# EAGLE board SparkFun_Magnetometer_MMC5983MA_Qwiic_Micro-Panel (EAGLE 9.6.2), part 1 of 7
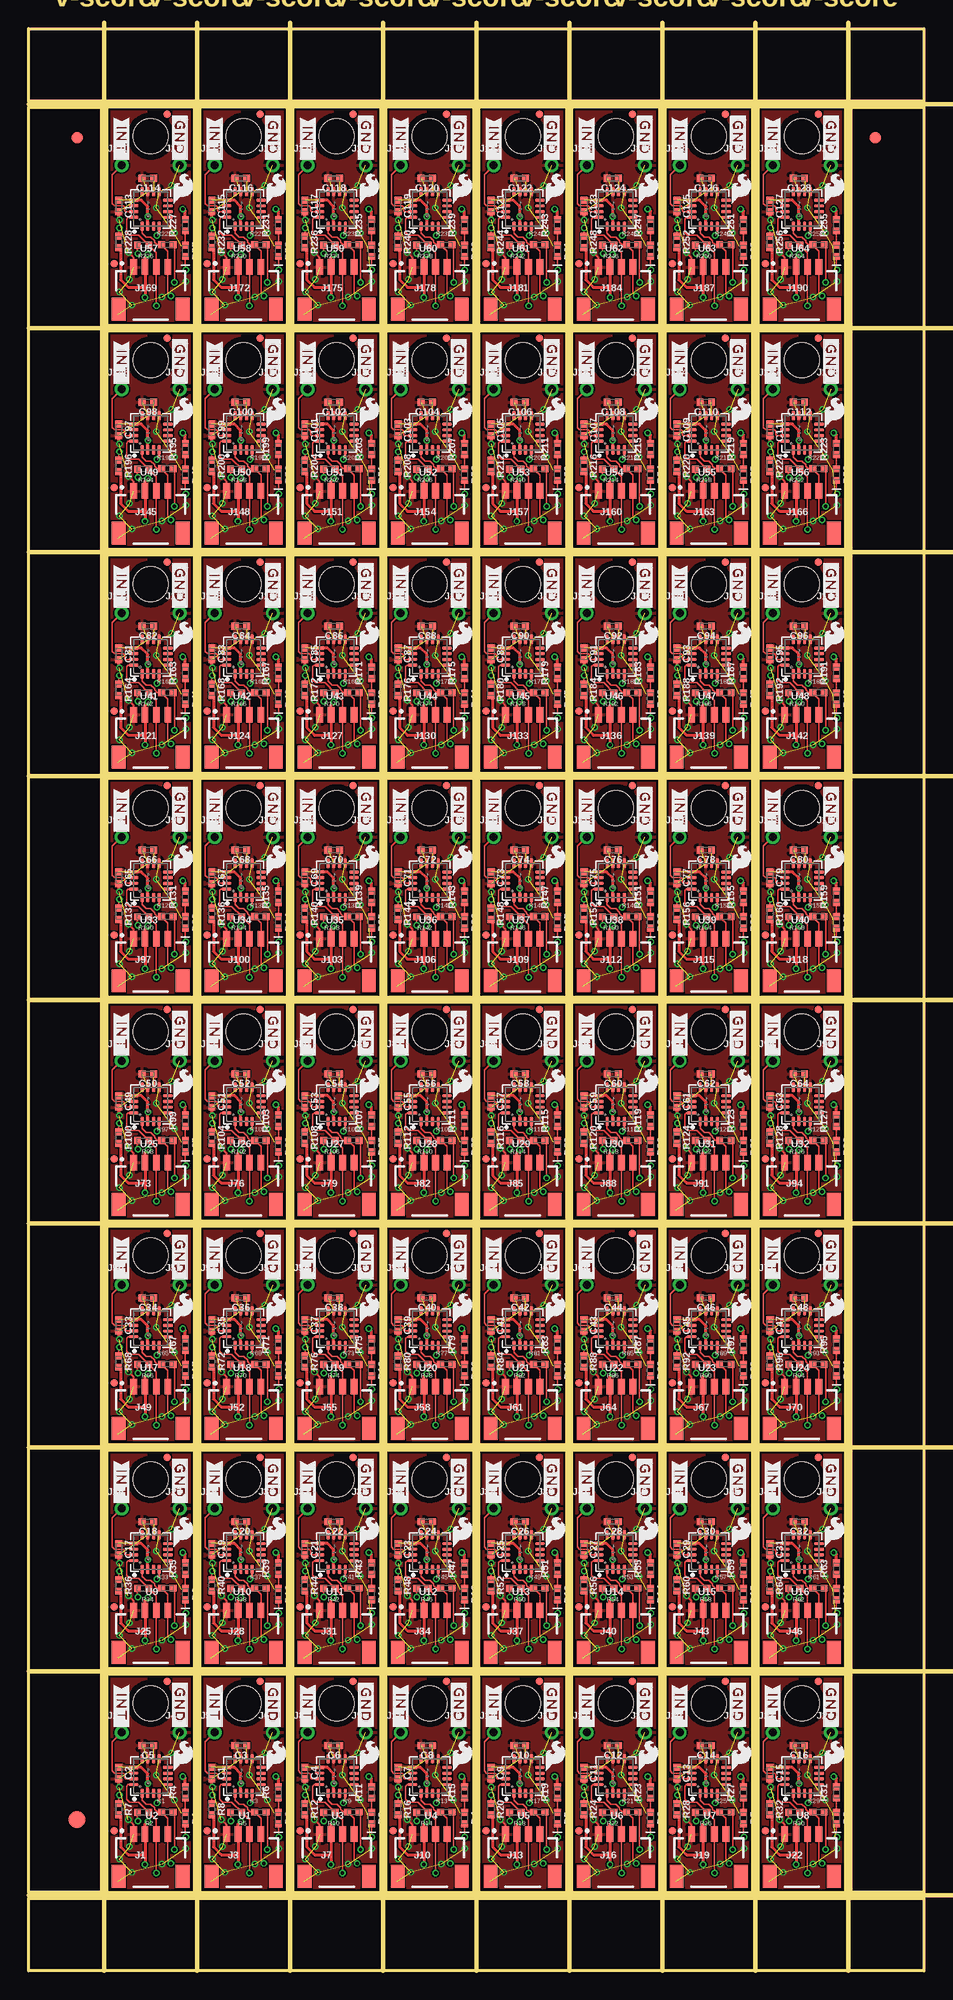
[diagram p0: board, top side]
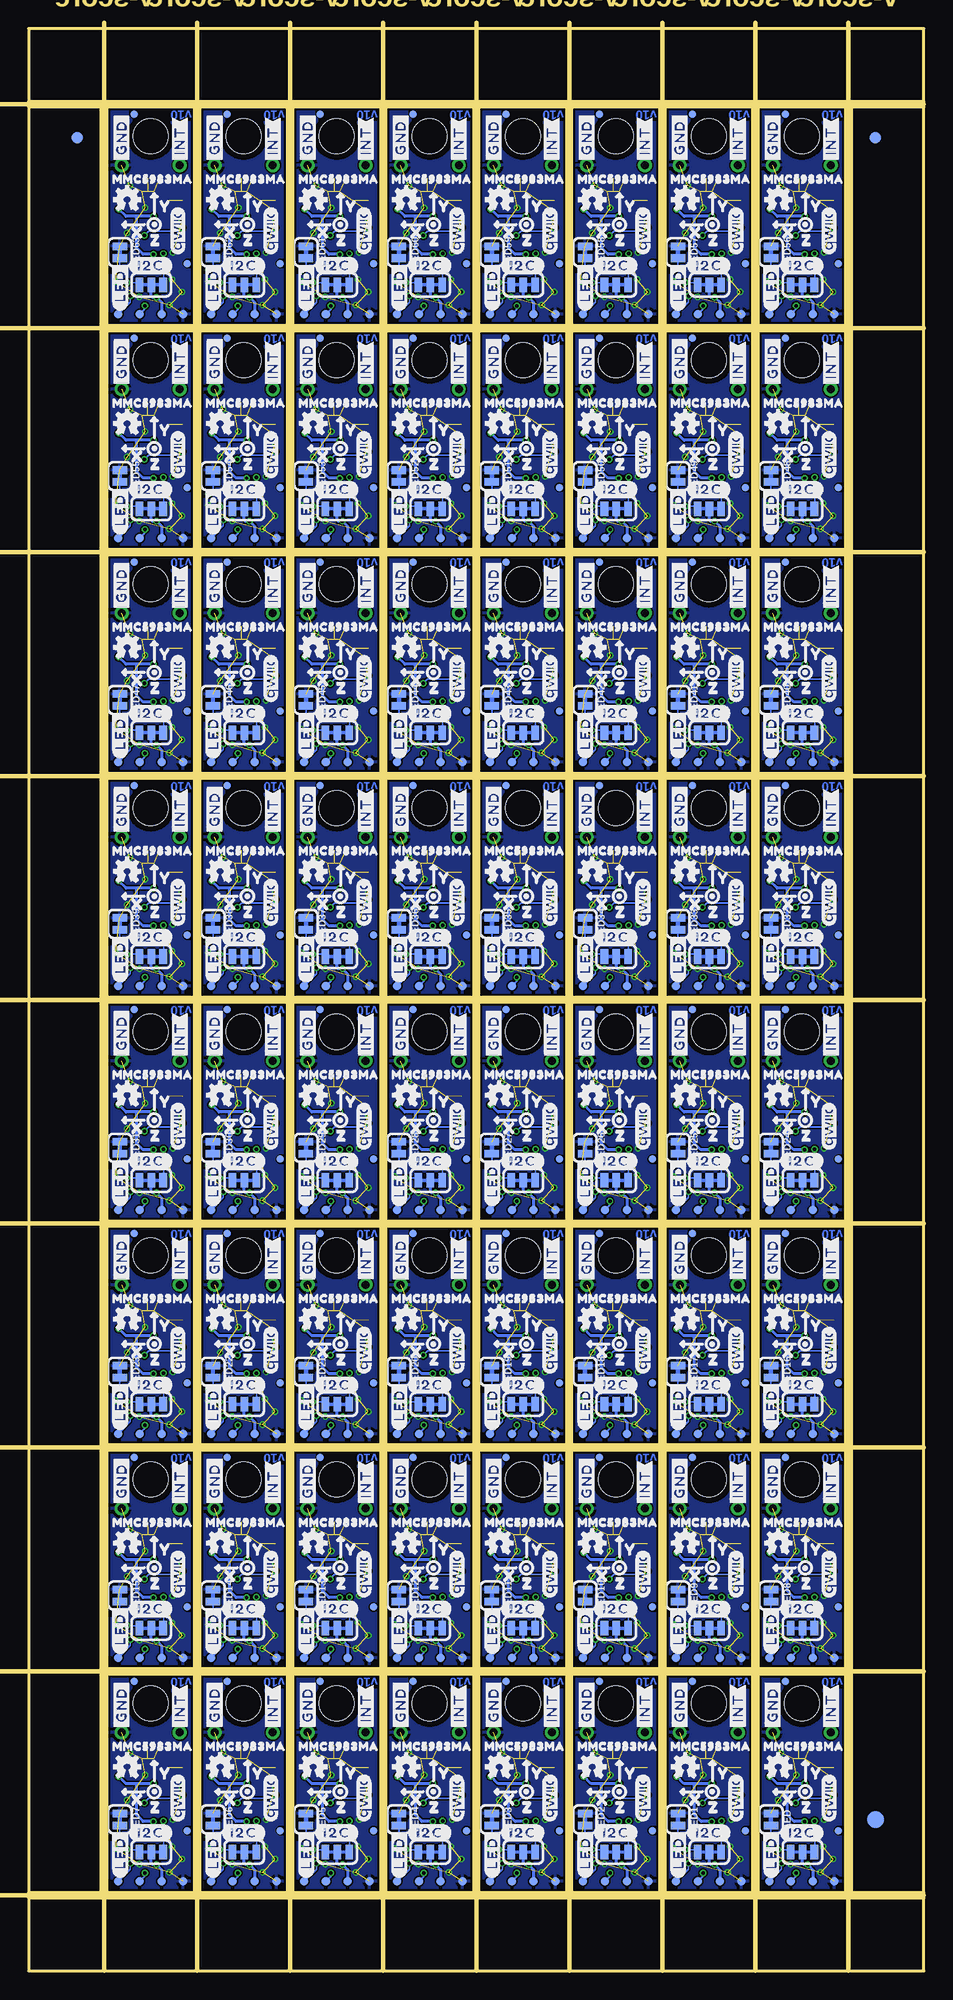
[diagram p1: board, bottom side, seen from below]

Size 78.23 x 169.67 mm. Coordinates in mm from the lower left corner, seen from the top.
Outline: 272 segments
Copper layers (1*16): Top 0.035mm / dielectric 1.5mm / Bottom 0.035mm
Design rules "SparkFun_Magnetometer_MMC5983MA_Qwiic_Micro": minimum track width 5mil, minimum drill 0.3mm, track to track 5mil, track to pad 5mil, pad to pad 5mil, via to via 5mil, smd to smd 5mil, copper to edge 7mil, drill to drill 7mil, minimum pad ring 5mil, minimum via ring 5mil, stop-mask expansion 2.5mil, vias tented up to drill 25mil, thermal gap 10mil
Milling: 18 lines

## Footprints (pad centres in the part's own frame; a part is rotated, then mirrored left to right if it is on the bottom)
0402-TIGHT = smd 0.6 x 0.6: 1 -0.5,0; 2 0.5,0
LED-0402 = smd 0.6 x 0.6: A -0.5,0; C 0.5,0
FIDUCIAL-1X2 = smd 1 x 1: 1 0,0
FIDUCIAL-1.5X3 = smd 1.5 x 1.5: 1 0,0
FIDUCIAL-MICRO = smd 0.635 x 0.635: 1 0,0
SMT-JUMPER_3_2-NC_TRACE_SILK = smd 0.66 x 1.27: 1 -1.041,0; 2 0,0; 3 1.041,0
JST04_1MM_RA = smd 0.6 x 1.35: 1 -1.5,0; 2 -0.5,0; 3 0.5,0; 4 1.5,0 | smd 1.2 x 2: NC1 2.8,-3.675; NC2 -2.8,-3.675
1X01_1MM_NO_SILK = drill 0.7 pad 1.2: 1 0,0
SMT-JUMPER_2_NC_TRACE_SILK = smd 0.66 x 1.27: 1 -0.521,0; 2 0.521,0
STAND-OFF-TIGHT = hole 3.048: 0,0
PAD.03X.03 = smd 0.762 x 0.762: 1 0,0
LGA-16-3X3MM-4X4PINS = smd 0.3 x 0.85: 1 0.754,1.498; 2 0.254,1.498; 3 -0.246,1.498; 4 -0.746,1.498; 9 -0.746,-1.506; 10 -0.246,-1.506; 11 0.254,-1.506; 12 0.754,-1.506 | smd 0.85 x 0.3: 5 -1.508,0.746; 6 -1.508,0.246; 7 -1.508,-0.254; 8 -1.508,-0.754; 13 1.496,-0.764; 14 1.496,-0.264; 15 1.496,0.236; 16 1.496,0.736

## Placement (x,y rotation side)
C1  1.0uF  [0402-TIGHT]  16.01,17.27 270 top
C2  1.0uF  [0402-TIGHT]  7.89,17.27 270 top
C3  10uF  [0402-TIGHT]  18.54,19.68 180 top
C4  1.0uF  [0402-TIGHT]  24.14,17.27 270 top
C5  10uF  [0402-TIGHT]  10.41,19.68 180 top
C6  10uF  [0402-TIGHT]  26.67,19.68 180 top
C7  1.0uF  [0402-TIGHT]  32.27,17.27 270 top
C8  10uF  [0402-TIGHT]  34.8,19.68 180 top
C9  1.0uF  [0402-TIGHT]  40.4,17.27 270 top
C10  10uF  [0402-TIGHT]  42.93,19.68 180 top
C11  1.0uF  [0402-TIGHT]  48.53,17.27 270 top
C12  10uF  [0402-TIGHT]  51.05,19.68 180 top
C13  1.0uF  [0402-TIGHT]  56.65,17.27 270 top
C14  10uF  [0402-TIGHT]  59.18,19.68 180 top
C15  1.0uF  [0402-TIGHT]  64.78,17.27 270 top
C16  10uF  [0402-TIGHT]  67.31,19.68 180 top
C17  1.0uF  [0402-TIGHT]  7.89,36.83 270 top
C18  10uF  [0402-TIGHT]  10.41,39.24 180 top
C19  1.0uF  [0402-TIGHT]  16.01,36.83 270 top
C20  10uF  [0402-TIGHT]  18.54,39.24 180 top
C21  1.0uF  [0402-TIGHT]  24.14,36.83 270 top
C22  10uF  [0402-TIGHT]  26.67,39.24 180 top
C23  1.0uF  [0402-TIGHT]  32.27,36.83 270 top
C24  10uF  [0402-TIGHT]  34.8,39.24 180 top
C25  1.0uF  [0402-TIGHT]  40.4,36.83 270 top
C26  10uF  [0402-TIGHT]  42.93,39.24 180 top
C27  1.0uF  [0402-TIGHT]  48.53,36.83 270 top
C28  10uF  [0402-TIGHT]  51.05,39.24 180 top
C29  1.0uF  [0402-TIGHT]  56.65,36.83 270 top
C30  10uF  [0402-TIGHT]  59.18,39.24 180 top
C31  1.0uF  [0402-TIGHT]  64.78,36.83 270 top
C32  10uF  [0402-TIGHT]  67.31,39.24 180 top
C33  1.0uF  [0402-TIGHT]  7.89,56.39 270 top
C34  10uF  [0402-TIGHT]  10.41,58.8 180 top
C35  1.0uF  [0402-TIGHT]  16.01,56.39 270 top
C36  10uF  [0402-TIGHT]  18.54,58.8 180 top
C37  1.0uF  [0402-TIGHT]  24.14,56.39 270 top
C38  10uF  [0402-TIGHT]  26.67,58.8 180 top
C39  1.0uF  [0402-TIGHT]  32.27,56.39 270 top
C40  10uF  [0402-TIGHT]  34.8,58.8 180 top
C41  1.0uF  [0402-TIGHT]  40.4,56.39 270 top
C42  10uF  [0402-TIGHT]  42.93,58.8 180 top
C43  1.0uF  [0402-TIGHT]  48.53,56.39 270 top
C44  10uF  [0402-TIGHT]  51.05,58.8 180 top
C45  1.0uF  [0402-TIGHT]  56.65,56.39 270 top
C46  10uF  [0402-TIGHT]  59.18,58.8 180 top
C47  1.0uF  [0402-TIGHT]  64.78,56.39 270 top
C48  10uF  [0402-TIGHT]  67.31,58.8 180 top
C49  1.0uF  [0402-TIGHT]  7.89,75.95 270 top
C50  10uF  [0402-TIGHT]  10.41,78.36 180 top
C51  1.0uF  [0402-TIGHT]  16.01,75.95 270 top
C52  10uF  [0402-TIGHT]  18.54,78.36 180 top
C53  1.0uF  [0402-TIGHT]  24.14,75.95 270 top
C54  10uF  [0402-TIGHT]  26.67,78.36 180 top
C55  1.0uF  [0402-TIGHT]  32.27,75.95 270 top
C56  10uF  [0402-TIGHT]  34.8,78.36 180 top
C57  1.0uF  [0402-TIGHT]  40.4,75.95 270 top
C58  10uF  [0402-TIGHT]  42.93,78.36 180 top
C59  1.0uF  [0402-TIGHT]  48.53,75.95 270 top
C60  10uF  [0402-TIGHT]  51.05,78.36 180 top
C61  1.0uF  [0402-TIGHT]  56.65,75.95 270 top
C62  10uF  [0402-TIGHT]  59.18,78.36 180 top
C63  1.0uF  [0402-TIGHT]  64.78,75.95 270 top
C64  10uF  [0402-TIGHT]  67.31,78.36 180 top
C65  1.0uF  [0402-TIGHT]  7.89,95.5 270 top
C66  10uF  [0402-TIGHT]  10.41,97.92 180 top
C67  1.0uF  [0402-TIGHT]  16.01,95.5 270 top
C68  10uF  [0402-TIGHT]  18.54,97.92 180 top
C69  1.0uF  [0402-TIGHT]  24.14,95.5 270 top
C70  10uF  [0402-TIGHT]  26.67,97.92 180 top
C71  1.0uF  [0402-TIGHT]  32.27,95.5 270 top
C72  10uF  [0402-TIGHT]  34.8,97.92 180 top
C73  1.0uF  [0402-TIGHT]  40.4,95.5 270 top
C74  10uF  [0402-TIGHT]  42.93,97.92 180 top
C75  1.0uF  [0402-TIGHT]  48.53,95.5 270 top
C76  10uF  [0402-TIGHT]  51.05,97.92 180 top
C77  1.0uF  [0402-TIGHT]  56.65,95.5 270 top
C78  10uF  [0402-TIGHT]  59.18,97.92 180 top
C79  1.0uF  [0402-TIGHT]  64.78,95.5 270 top
C80  10uF  [0402-TIGHT]  67.31,97.92 180 top
C81  1.0uF  [0402-TIGHT]  7.89,115.06 270 top
C82  10uF  [0402-TIGHT]  10.41,117.48 180 top
C83  1.0uF  [0402-TIGHT]  16.01,115.06 270 top
C84  10uF  [0402-TIGHT]  18.54,117.48 180 top
C85  1.0uF  [0402-TIGHT]  24.14,115.06 270 top
C86  10uF  [0402-TIGHT]  26.67,117.48 180 top
C87  1.0uF  [0402-TIGHT]  32.27,115.06 270 top
C88  10uF  [0402-TIGHT]  34.8,117.48 180 top
C89  1.0uF  [0402-TIGHT]  40.4,115.06 270 top
C90  10uF  [0402-TIGHT]  42.93,117.48 180 top
C91  1.0uF  [0402-TIGHT]  48.53,115.06 270 top
C92  10uF  [0402-TIGHT]  51.05,117.48 180 top
C93  1.0uF  [0402-TIGHT]  56.65,115.06 270 top
C94  10uF  [0402-TIGHT]  59.18,117.48 180 top
C95  1.0uF  [0402-TIGHT]  64.78,115.06 270 top
C96  10uF  [0402-TIGHT]  67.31,117.48 180 top
C97  1.0uF  [0402-TIGHT]  7.89,134.62 270 top
C98  10uF  [0402-TIGHT]  10.41,137.03 180 top
C99  1.0uF  [0402-TIGHT]  16.01,134.62 270 top
C100  10uF  [0402-TIGHT]  18.54,137.03 180 top
C101  1.0uF  [0402-TIGHT]  24.14,134.62 270 top
C102  10uF  [0402-TIGHT]  26.67,137.03 180 top
C103  1.0uF  [0402-TIGHT]  32.27,134.62 270 top
C104  10uF  [0402-TIGHT]  34.8,137.03 180 top
C105  1.0uF  [0402-TIGHT]  40.4,134.62 270 top
C106  10uF  [0402-TIGHT]  42.93,137.03 180 top
C107  1.0uF  [0402-TIGHT]  48.53,134.62 270 top
C108  10uF  [0402-TIGHT]  51.05,137.03 180 top
C109  1.0uF  [0402-TIGHT]  56.65,134.62 270 top
C110  10uF  [0402-TIGHT]  59.18,137.03 180 top
C111  1.0uF  [0402-TIGHT]  64.78,134.62 270 top
C112  10uF  [0402-TIGHT]  67.31,137.03 180 top
C113  1.0uF  [0402-TIGHT]  7.89,154.18 270 top
C114  10uF  [0402-TIGHT]  10.41,156.59 180 top
C115  1.0uF  [0402-TIGHT]  16.01,154.18 270 top
C116  10uF  [0402-TIGHT]  18.54,156.59 180 top
C117  1.0uF  [0402-TIGHT]  24.14,154.18 270 top
C118  10uF  [0402-TIGHT]  26.67,156.59 180 top
C119  1.0uF  [0402-TIGHT]  32.27,154.18 270 top
C120  10uF  [0402-TIGHT]  34.8,156.59 180 top
C121  1.0uF  [0402-TIGHT]  40.4,154.18 270 top
C122  10uF  [0402-TIGHT]  42.93,156.59 180 top
C123  1.0uF  [0402-TIGHT]  48.53,154.18 270 top
C124  10uF  [0402-TIGHT]  51.05,156.59 180 top
C125  1.0uF  [0402-TIGHT]  56.65,154.18 270 top
C126  10uF  [0402-TIGHT]  59.18,156.59 180 top
C127  1.0uF  [0402-TIGHT]  64.78,154.18 270 top
C128  10uF  [0402-TIGHT]  67.31,156.59 180 top
D1  RED  [LED-0402]  13.7,13.36 270 top
D2  RED  [LED-0402]  21.82,13.36 270 top
D3  RED  [LED-0402]  29.95,13.36 270 top
D4  RED  [LED-0402]  38.08,13.36 270 top
D5  RED  [LED-0402]  46.21,13.36 270 top
D6  RED  [LED-0402]  54.34,13.36 270 top
D7  RED  [LED-0402]  62.46,13.36 270 top
D8  RED  [LED-0402]  70.59,13.36 270 top
D9  RED  [LED-0402]  13.7,32.92 270 top
D10  RED  [LED-0402]  21.82,32.92 270 top
D11  RED  [LED-0402]  29.95,32.92 270 top
D12  RED  [LED-0402]  38.08,32.92 270 top
D13  RED  [LED-0402]  46.21,32.92 270 top
D14  RED  [LED-0402]  54.34,32.92 270 top
D15  RED  [LED-0402]  62.46,32.92 270 top
D16  RED  [LED-0402]  70.59,32.92 270 top
D17  RED  [LED-0402]  13.7,52.48 270 top
D18  RED  [LED-0402]  21.82,52.48 270 top
D19  RED  [LED-0402]  29.95,52.48 270 top
D20  RED  [LED-0402]  38.08,52.48 270 top
D21  RED  [LED-0402]  46.21,52.48 270 top
D22  RED  [LED-0402]  54.34,52.48 270 top
D23  RED  [LED-0402]  62.46,52.48 270 top
D24  RED  [LED-0402]  70.59,52.48 270 top
D25  RED  [LED-0402]  13.7,72.03 270 top
D26  RED  [LED-0402]  21.82,72.03 270 top
D27  RED  [LED-0402]  29.95,72.03 270 top
D28  RED  [LED-0402]  38.08,72.03 270 top
D29  RED  [LED-0402]  46.21,72.03 270 top
D30  RED  [LED-0402]  54.34,72.03 270 top
D31  RED  [LED-0402]  62.46,72.03 270 top
D32  RED  [LED-0402]  70.59,72.03 270 top
D33  RED  [LED-0402]  13.7,91.59 270 top
D34  RED  [LED-0402]  21.82,91.59 270 top
D35  RED  [LED-0402]  29.95,91.59 270 top
D36  RED  [LED-0402]  38.08,91.59 270 top
D37  RED  [LED-0402]  46.21,91.59 270 top
D38  RED  [LED-0402]  54.34,91.59 270 top
D39  RED  [LED-0402]  62.46,91.59 270 top
D40  RED  [LED-0402]  70.59,91.59 270 top
D41  RED  [LED-0402]  13.7,111.15 270 top
D42  RED  [LED-0402]  21.82,111.15 270 top
D43  RED  [LED-0402]  29.95,111.15 270 top
D44  RED  [LED-0402]  38.08,111.15 270 top
D45  RED  [LED-0402]  46.21,111.15 270 top
D46  RED  [LED-0402]  54.34,111.15 270 top
D47  RED  [LED-0402]  62.46,111.15 270 top
D48  RED  [LED-0402]  70.59,111.15 270 top
D49  RED  [LED-0402]  13.7,130.71 270 top
D50  RED  [LED-0402]  21.82,130.71 270 top
D51  RED  [LED-0402]  29.95,130.71 270 top
D52  RED  [LED-0402]  38.08,130.71 270 top
D53  RED  [LED-0402]  46.21,130.71 270 top
D54  RED  [LED-0402]  54.34,130.71 270 top
D55  RED  [LED-0402]  62.46,130.71 270 top
D56  RED  [LED-0402]  70.59,130.71 270 top
D57  RED  [LED-0402]  13.7,150.27 270 top
D58  RED  [LED-0402]  21.82,150.27 270 top
D59  RED  [LED-0402]  29.95,150.27 270 top
D60  RED  [LED-0402]  38.08,150.27 270 top
D61  RED  [LED-0402]  46.21,150.27 270 top
D62  RED  [LED-0402]  54.34,150.27 270 top
D63  RED  [LED-0402]  62.46,150.27 270 top
D64  RED  [LED-0402]  70.59,150.27 270 top
E$1  [FIDUCIAL-1X2]  4.23,160.15 0 top
E$2  [FIDUCIAL-1X2]  4.23,160.15 0 bottom
E$3  [FIDUCIAL-1X2]  74,160.15 0 top
E$4  [FIDUCIAL-1X2]  74,160.15 0 bottom
E$5  [FIDUCIAL-1.5X3]  4.23,13.21 0 top
E$6  [FIDUCIAL-1.5X3]  4.23,13.21 0 bottom
FD1  FIDUCIALUFIDUCIAL  [FIDUCIAL-MICRO]  12.12,25.3 90 bottom
FD2  FIDUCIALUFIDUCIAL  [FIDUCIAL-MICRO]  7.47,12.24 90 bottom
FD3  FIDUCIALUFIDUCIAL  [FIDUCIAL-MICRO]  20.24,25.3 90 bottom
FD4  FIDUCIALUFIDUCIAL  [FIDUCIAL-MICRO]  15.6,12.24 90 bottom
FD5  FIDUCIALUFIDUCIAL  [FIDUCIAL-MICRO]  28.37,25.3 90 bottom
FD6  FIDUCIALUFIDUCIAL  [FIDUCIAL-MICRO]  23.72,12.24 90 bottom
FD7  FIDUCIALUFIDUCIAL  [FIDUCIAL-MICRO]  36.5,25.3 90 bottom
FD8  FIDUCIALUFIDUCIAL  [FIDUCIAL-MICRO]  31.85,12.24 90 bottom
FD9  FIDUCIALUFIDUCIAL  [FIDUCIAL-MICRO]  44.63,25.3 90 bottom
FD10  FIDUCIALUFIDUCIAL  [FIDUCIAL-MICRO]  39.98,12.24 90 bottom
FD11  FIDUCIALUFIDUCIAL  [FIDUCIAL-MICRO]  52.76,25.3 90 bottom
FD12  FIDUCIALUFIDUCIAL  [FIDUCIAL-MICRO]  48.11,12.24 90 bottom
FD13  FIDUCIALUFIDUCIAL  [FIDUCIAL-MICRO]  60.88,25.3 90 bottom
FD14  FIDUCIALUFIDUCIAL  [FIDUCIAL-MICRO]  56.24,12.24 90 bottom
FD15  FIDUCIALUFIDUCIAL  [FIDUCIAL-MICRO]  69.01,25.3 90 bottom
FD16  FIDUCIALUFIDUCIAL  [FIDUCIAL-MICRO]  64.36,12.24 90 bottom
FD17  FIDUCIALUFIDUCIAL  [FIDUCIAL-MICRO]  12.12,44.86 90 bottom
FD18  FIDUCIALUFIDUCIAL  [FIDUCIAL-MICRO]  7.47,31.8 90 bottom
FD19  FIDUCIALUFIDUCIAL  [FIDUCIAL-MICRO]  20.24,44.86 90 bottom
FD20  FIDUCIALUFIDUCIAL  [FIDUCIAL-MICRO]  15.6,31.8 90 bottom
FD21  FIDUCIALUFIDUCIAL  [FIDUCIAL-MICRO]  28.37,44.86 90 bottom
FD22  FIDUCIALUFIDUCIAL  [FIDUCIAL-MICRO]  23.72,31.8 90 bottom
FD23  FIDUCIALUFIDUCIAL  [FIDUCIAL-MICRO]  36.5,44.86 90 bottom
FD24  FIDUCIALUFIDUCIAL  [FIDUCIAL-MICRO]  31.85,31.8 90 bottom
FD25  FIDUCIALUFIDUCIAL  [FIDUCIAL-MICRO]  44.63,44.86 90 bottom
FD26  FIDUCIALUFIDUCIAL  [FIDUCIAL-MICRO]  39.98,31.8 90 bottom
FD27  FIDUCIALUFIDUCIAL  [FIDUCIAL-MICRO]  52.76,44.86 90 bottom
FD28  FIDUCIALUFIDUCIAL  [FIDUCIAL-MICRO]  48.11,31.8 90 bottom
FD29  FIDUCIALUFIDUCIAL  [FIDUCIAL-MICRO]  60.88,44.86 90 bottom
FD30  FIDUCIALUFIDUCIAL  [FIDUCIAL-MICRO]  56.24,31.8 90 bottom
FD31  FIDUCIALUFIDUCIAL  [FIDUCIAL-MICRO]  69.01,44.86 90 bottom
FD32  FIDUCIALUFIDUCIAL  [FIDUCIAL-MICRO]  64.36,31.8 90 bottom
FD33  FIDUCIALUFIDUCIAL  [FIDUCIAL-MICRO]  12.12,64.41 90 bottom
FD34  FIDUCIALUFIDUCIAL  [FIDUCIAL-MICRO]  7.47,51.36 90 bottom
FD35  FIDUCIALUFIDUCIAL  [FIDUCIAL-MICRO]  20.24,64.41 90 bottom
FD36  FIDUCIALUFIDUCIAL  [FIDUCIAL-MICRO]  15.6,51.36 90 bottom
FD37  FIDUCIALUFIDUCIAL  [FIDUCIAL-MICRO]  28.37,64.41 90 bottom
FD38  FIDUCIALUFIDUCIAL  [FIDUCIAL-MICRO]  23.72,51.36 90 bottom
FD39  FIDUCIALUFIDUCIAL  [FIDUCIAL-MICRO]  36.5,64.41 90 bottom
FD40  FIDUCIALUFIDUCIAL  [FIDUCIAL-MICRO]  31.85,51.36 90 bottom
FD41  FIDUCIALUFIDUCIAL  [FIDUCIAL-MICRO]  44.63,64.41 90 bottom
FD42  FIDUCIALUFIDUCIAL  [FIDUCIAL-MICRO]  39.98,51.36 90 bottom
FD43  FIDUCIALUFIDUCIAL  [FIDUCIAL-MICRO]  52.76,64.41 90 bottom
FD44  FIDUCIALUFIDUCIAL  [FIDUCIAL-MICRO]  48.11,51.36 90 bottom
FD45  FIDUCIALUFIDUCIAL  [FIDUCIAL-MICRO]  60.88,64.41 90 bottom
FD46  FIDUCIALUFIDUCIAL  [FIDUCIAL-MICRO]  56.24,51.36 90 bottom
FD47  FIDUCIALUFIDUCIAL  [FIDUCIAL-MICRO]  69.01,64.41 90 bottom
FD48  FIDUCIALUFIDUCIAL  [FIDUCIAL-MICRO]  64.36,51.36 90 bottom
FD49  FIDUCIALUFIDUCIAL  [FIDUCIAL-MICRO]  12.12,83.97 90 bottom
FD50  FIDUCIALUFIDUCIAL  [FIDUCIAL-MICRO]  7.47,70.92 90 bottom
FD51  FIDUCIALUFIDUCIAL  [FIDUCIAL-MICRO]  20.24,83.97 90 bottom
FD52  FIDUCIALUFIDUCIAL  [FIDUCIAL-MICRO]  15.6,70.92 90 bottom
FD53  FIDUCIALUFIDUCIAL  [FIDUCIAL-MICRO]  28.37,83.97 90 bottom
FD54  FIDUCIALUFIDUCIAL  [FIDUCIAL-MICRO]  23.72,70.92 90 bottom
FD55  FIDUCIALUFIDUCIAL  [FIDUCIAL-MICRO]  36.5,83.97 90 bottom
FD56  FIDUCIALUFIDUCIAL  [FIDUCIAL-MICRO]  31.85,70.92 90 bottom
FD57  FIDUCIALUFIDUCIAL  [FIDUCIAL-MICRO]  44.63,83.97 90 bottom
FD58  FIDUCIALUFIDUCIAL  [FIDUCIAL-MICRO]  39.98,70.92 90 bottom
FD59  FIDUCIALUFIDUCIAL  [FIDUCIAL-MICRO]  52.76,83.97 90 bottom
FD60  FIDUCIALUFIDUCIAL  [FIDUCIAL-MICRO]  48.11,70.92 90 bottom
FD61  FIDUCIALUFIDUCIAL  [FIDUCIAL-MICRO]  60.88,83.97 90 bottom
FD62  FIDUCIALUFIDUCIAL  [FIDUCIAL-MICRO]  56.24,70.92 90 bottom
FD63  FIDUCIALUFIDUCIAL  [FIDUCIAL-MICRO]  69.01,83.97 90 bottom
FD64  FIDUCIALUFIDUCIAL  [FIDUCIAL-MICRO]  64.36,70.92 90 bottom
FD65  FIDUCIALUFIDUCIAL  [FIDUCIAL-MICRO]  12.12,103.53 90 bottom
FD66  FIDUCIALUFIDUCIAL  [FIDUCIAL-MICRO]  7.47,90.47 90 bottom
FD67  FIDUCIALUFIDUCIAL  [FIDUCIAL-MICRO]  20.24,103.53 90 bottom
FD68  FIDUCIALUFIDUCIAL  [FIDUCIAL-MICRO]  15.6,90.47 90 bottom
FD69  FIDUCIALUFIDUCIAL  [FIDUCIAL-MICRO]  28.37,103.53 90 bottom
FD70  FIDUCIALUFIDUCIAL  [FIDUCIAL-MICRO]  23.72,90.47 90 bottom
FD71  FIDUCIALUFIDUCIAL  [FIDUCIAL-MICRO]  36.5,103.53 90 bottom
FD72  FIDUCIALUFIDUCIAL  [FIDUCIAL-MICRO]  31.85,90.47 90 bottom
FD73  FIDUCIALUFIDUCIAL  [FIDUCIAL-MICRO]  44.63,103.53 90 bottom
FD74  FIDUCIALUFIDUCIAL  [FIDUCIAL-MICRO]  39.98,90.47 90 bottom
FD75  FIDUCIALUFIDUCIAL  [FIDUCIAL-MICRO]  52.76,103.53 90 bottom
FD76  FIDUCIALUFIDUCIAL  [FIDUCIAL-MICRO]  48.11,90.47 90 bottom
FD77  FIDUCIALUFIDUCIAL  [FIDUCIAL-MICRO]  60.88,103.53 90 bottom
FD78  FIDUCIALUFIDUCIAL  [FIDUCIAL-MICRO]  56.24,90.47 90 bottom
FD79  FIDUCIALUFIDUCIAL  [FIDUCIAL-MICRO]  69.01,103.53 90 bottom
FD80  FIDUCIALUFIDUCIAL  [FIDUCIAL-MICRO]  64.36,90.47 90 bottom
FD81  FIDUCIALUFIDUCIAL  [FIDUCIAL-MICRO]  12.12,123.09 90 bottom
FD82  FIDUCIALUFIDUCIAL  [FIDUCIAL-MICRO]  7.47,110.03 90 bottom
FD83  FIDUCIALUFIDUCIAL  [FIDUCIAL-MICRO]  20.24,123.09 90 bottom
FD84  FIDUCIALUFIDUCIAL  [FIDUCIAL-MICRO]  15.6,110.03 90 bottom
FD85  FIDUCIALUFIDUCIAL  [FIDUCIAL-MICRO]  28.37,123.09 90 bottom
FD86  FIDUCIALUFIDUCIAL  [FIDUCIAL-MICRO]  23.72,110.03 90 bottom
FD87  FIDUCIALUFIDUCIAL  [FIDUCIAL-MICRO]  36.5,123.09 90 bottom
FD88  FIDUCIALUFIDUCIAL  [FIDUCIAL-MICRO]  31.85,110.03 90 bottom
FD89  FIDUCIALUFIDUCIAL  [FIDUCIAL-MICRO]  44.63,123.09 90 bottom
FD90  FIDUCIALUFIDUCIAL  [FIDUCIAL-MICRO]  39.98,110.03 90 bottom
FD91  FIDUCIALUFIDUCIAL  [FIDUCIAL-MICRO]  52.76,123.09 90 bottom
FD92  FIDUCIALUFIDUCIAL  [FIDUCIAL-MICRO]  48.11,110.03 90 bottom
FD93  FIDUCIALUFIDUCIAL  [FIDUCIAL-MICRO]  60.88,123.09 90 bottom
FD94  FIDUCIALUFIDUCIAL  [FIDUCIAL-MICRO]  56.24,110.03 90 bottom
FD95  FIDUCIALUFIDUCIAL  [FIDUCIAL-MICRO]  69.01,123.09 90 bottom
FD96  FIDUCIALUFIDUCIAL  [FIDUCIAL-MICRO]  64.36,110.03 90 bottom
FD97  FIDUCIALUFIDUCIAL  [FIDUCIAL-MICRO]  12.12,142.65 90 bottom
FD98  FIDUCIALUFIDUCIAL  [FIDUCIAL-MICRO]  7.47,129.59 90 bottom
FD99  FIDUCIALUFIDUCIAL  [FIDUCIAL-MICRO]  20.24,142.65 90 bottom
FD100  FIDUCIALUFIDUCIAL  [FIDUCIAL-MICRO]  15.6,129.59 90 bottom
FD101  FIDUCIALUFIDUCIAL  [FIDUCIAL-MICRO]  28.37,142.65 90 bottom
FD102  FIDUCIALUFIDUCIAL  [FIDUCIAL-MICRO]  23.72,129.59 90 bottom
FD103  FIDUCIALUFIDUCIAL  [FIDUCIAL-MICRO]  36.5,142.65 90 bottom
FD104  FIDUCIALUFIDUCIAL  [FIDUCIAL-MICRO]  31.85,129.59 90 bottom
FD105  FIDUCIALUFIDUCIAL  [FIDUCIAL-MICRO]  44.63,142.65 90 bottom
FD106  FIDUCIALUFIDUCIAL  [FIDUCIAL-MICRO]  39.98,129.59 90 bottom
FD107  FIDUCIALUFIDUCIAL  [FIDUCIAL-MICRO]  52.76,142.65 90 bottom
FD108  FIDUCIALUFIDUCIAL  [FIDUCIAL-MICRO]  48.11,129.59 90 bottom
FD109  FIDUCIALUFIDUCIAL  [FIDUCIAL-MICRO]  60.88,142.65 90 bottom
FD110  FIDUCIALUFIDUCIAL  [FIDUCIAL-MICRO]  56.24,129.59 90 bottom
FD111  FIDUCIALUFIDUCIAL  [FIDUCIAL-MICRO]  69.01,142.65 90 bottom
FD112  FIDUCIALUFIDUCIAL  [FIDUCIAL-MICRO]  64.36,129.59 90 bottom
FD113  FIDUCIALUFIDUCIAL  [FIDUCIAL-MICRO]  12.12,162.2 90 bottom
FD114  FIDUCIALUFIDUCIAL  [FIDUCIAL-MICRO]  7.47,149.15 90 bottom
FD115  FIDUCIALUFIDUCIAL  [FIDUCIAL-MICRO]  20.24,162.2 90 bottom
FD116  FIDUCIALUFIDUCIAL  [FIDUCIAL-MICRO]  15.6,149.15 90 bottom
FD117  FIDUCIALUFIDUCIAL  [FIDUCIAL-MICRO]  28.37,162.2 90 bottom
FD118  FIDUCIALUFIDUCIAL  [FIDUCIAL-MICRO]  23.72,149.15 90 bottom
FD119  FIDUCIALUFIDUCIAL  [FIDUCIAL-MICRO]  36.5,162.2 90 bottom
FD120  FIDUCIALUFIDUCIAL  [FIDUCIAL-MICRO]  31.85,149.15 90 bottom
FD121  FIDUCIALUFIDUCIAL  [FIDUCIAL-MICRO]  44.63,162.2 90 bottom
FD122  FIDUCIALUFIDUCIAL  [FIDUCIAL-MICRO]  39.98,149.15 90 bottom
FD123  FIDUCIALUFIDUCIAL  [FIDUCIAL-MICRO]  52.76,162.2 90 bottom
FD124  FIDUCIALUFIDUCIAL  [FIDUCIAL-MICRO]  48.11,149.15 90 bottom
FD125  FIDUCIALUFIDUCIAL  [FIDUCIAL-MICRO]  60.88,162.2 90 bottom
FD126  FIDUCIALUFIDUCIAL  [FIDUCIAL-MICRO]  56.24,149.15 90 bottom
FD127  FIDUCIALUFIDUCIAL  [FIDUCIAL-MICRO]  69.01,162.2 90 bottom
FD128  FIDUCIALUFIDUCIAL  [FIDUCIAL-MICRO]  64.36,149.15 90 bottom
FID1  FIDUCIALUFIDUCIAL  [FIDUCIAL-MICRO]  12.12,25.3 270 top
FID2  FIDUCIALUFIDUCIAL  [FIDUCIAL-MICRO]  7.47,12.24 270 top
FID3  FIDUCIALUFIDUCIAL  [FIDUCIAL-MICRO]  20.24,25.3 270 top
FID4  FIDUCIALUFIDUCIAL  [FIDUCIAL-MICRO]  15.6,12.24 270 top
FID5  FIDUCIALUFIDUCIAL  [FIDUCIAL-MICRO]  28.37,25.3 270 top
FID6  FIDUCIALUFIDUCIAL  [FIDUCIAL-MICRO]  23.72,12.24 270 top
FID7  FIDUCIALUFIDUCIAL  [FIDUCIAL-MICRO]  36.5,25.3 270 top
FID8  FIDUCIALUFIDUCIAL  [FIDUCIAL-MICRO]  31.85,12.24 270 top
FID9  FIDUCIALUFIDUCIAL  [FIDUCIAL-MICRO]  44.63,25.3 270 top
FID10  FIDUCIALUFIDUCIAL  [FIDUCIAL-MICRO]  39.98,12.24 270 top
FID11  FIDUCIALUFIDUCIAL  [FIDUCIAL-MICRO]  52.76,25.3 270 top
FID12  FIDUCIALUFIDUCIAL  [FIDUCIAL-MICRO]  48.11,12.24 270 top
FID13  FIDUCIALUFIDUCIAL  [FIDUCIAL-MICRO]  60.88,25.3 270 top
FID14  FIDUCIALUFIDUCIAL  [FIDUCIAL-MICRO]  56.24,12.24 270 top
FID15  FIDUCIALUFIDUCIAL  [FIDUCIAL-MICRO]  69.01,25.3 270 top
FID16  FIDUCIALUFIDUCIAL  [FIDUCIAL-MICRO]  64.36,12.24 270 top
FID17  FIDUCIALUFIDUCIAL  [FIDUCIAL-MICRO]  12.12,44.86 270 top
FID18  FIDUCIALUFIDUCIAL  [FIDUCIAL-MICRO]  7.47,31.8 270 top
FID19  FIDUCIALUFIDUCIAL  [FIDUCIAL-MICRO]  20.24,44.86 270 top
FID20  FIDUCIALUFIDUCIAL  [FIDUCIAL-MICRO]  15.6,31.8 270 top
FID21  FIDUCIALUFIDUCIAL  [FIDUCIAL-MICRO]  28.37,44.86 270 top
FID22  FIDUCIALUFIDUCIAL  [FIDUCIAL-MICRO]  23.72,31.8 270 top
FID23  FIDUCIALUFIDUCIAL  [FIDUCIAL-MICRO]  36.5,44.86 270 top
FID24  FIDUCIALUFIDUCIAL  [FIDUCIAL-MICRO]  31.85,31.8 270 top
FID25  FIDUCIALUFIDUCIAL  [FIDUCIAL-MICRO]  44.63,44.86 270 top
FID26  FIDUCIALUFIDUCIAL  [FIDUCIAL-MICRO]  39.98,31.8 270 top
FID27  FIDUCIALUFIDUCIAL  [FIDUCIAL-MICRO]  52.76,44.86 270 top
FID28  FIDUCIALUFIDUCIAL  [FIDUCIAL-MICRO]  48.11,31.8 270 top
FID29  FIDUCIALUFIDUCIAL  [FIDUCIAL-MICRO]  60.88,44.86 270 top
FID30  FIDUCIALUFIDUCIAL  [FIDUCIAL-MICRO]  56.24,31.8 270 top
FID31  FIDUCIALUFIDUCIAL  [FIDUCIAL-MICRO]  69.01,44.86 270 top
FID32  FIDUCIALUFIDUCIAL  [FIDUCIAL-MICRO]  64.36,31.8 270 top
FID33  FIDUCIALUFIDUCIAL  [FIDUCIAL-MICRO]  12.12,64.41 270 top
FID34  FIDUCIALUFIDUCIAL  [FIDUCIAL-MICRO]  7.47,51.36 270 top
FID35  FIDUCIALUFIDUCIAL  [FIDUCIAL-MICRO]  20.24,64.41 270 top
FID36  FIDUCIALUFIDUCIAL  [FIDUCIAL-MICRO]  15.6,51.36 270 top
FID37  FIDUCIALUFIDUCIAL  [FIDUCIAL-MICRO]  28.37,64.41 270 top
FID38  FIDUCIALUFIDUCIAL  [FIDUCIAL-MICRO]  23.72,51.36 270 top
FID39  FIDUCIALUFIDUCIAL  [FIDUCIAL-MICRO]  36.5,64.41 270 top
FID40  FIDUCIALUFIDUCIAL  [FIDUCIAL-MICRO]  31.85,51.36 270 top
FID41  FIDUCIALUFIDUCIAL  [FIDUCIAL-MICRO]  44.63,64.41 270 top
FID42  FIDUCIALUFIDUCIAL  [FIDUCIAL-MICRO]  39.98,51.36 270 top
FID43  FIDUCIALUFIDUCIAL  [FIDUCIAL-MICRO]  52.76,64.41 270 top
FID44  FIDUCIALUFIDUCIAL  [FIDUCIAL-MICRO]  48.11,51.36 270 top
FID45  FIDUCIALUFIDUCIAL  [FIDUCIAL-MICRO]  60.88,64.41 270 top
FID46  FIDUCIALUFIDUCIAL  [FIDUCIAL-MICRO]  56.24,51.36 270 top
FID47  FIDUCIALUFIDUCIAL  [FIDUCIAL-MICRO]  69.01,64.41 270 top
FID48  FIDUCIALUFIDUCIAL  [FIDUCIAL-MICRO]  64.36,51.36 270 top
FID49  FIDUCIALUFIDUCIAL  [FIDUCIAL-MICRO]  12.12,83.97 270 top
FID50  FIDUCIALUFIDUCIAL  [FIDUCIAL-MICRO]  7.47,70.92 270 top
FID51  FIDUCIALUFIDUCIAL  [FIDUCIAL-MICRO]  20.24,83.97 270 top
FID52  FIDUCIALUFIDUCIAL  [FIDUCIAL-MICRO]  15.6,70.92 270 top
FID53  FIDUCIALUFIDUCIAL  [FIDUCIAL-MICRO]  28.37,83.97 270 top
FID54  FIDUCIALUFIDUCIAL  [FIDUCIAL-MICRO]  23.72,70.92 270 top
FID55  FIDUCIALUFIDUCIAL  [FIDUCIAL-MICRO]  36.5,83.97 270 top
FID56  FIDUCIALUFIDUCIAL  [FIDUCIAL-MICRO]  31.85,70.92 270 top
FID57  FIDUCIALUFIDUCIAL  [FIDUCIAL-MICRO]  44.63,83.97 270 top
FID58  FIDUCIALUFIDUCIAL  [FIDUCIAL-MICRO]  39.98,70.92 270 top
FID59  FIDUCIALUFIDUCIAL  [FIDUCIAL-MICRO]  52.76,83.97 270 top
FID60  FIDUCIALUFIDUCIAL  [FIDUCIAL-MICRO]  48.11,70.92 270 top
FID61  FIDUCIALUFIDUCIAL  [FIDUCIAL-MICRO]  60.88,83.97 270 top
FID62  FIDUCIALUFIDUCIAL  [FIDUCIAL-MICRO]  56.24,70.92 270 top
FID63  FIDUCIALUFIDUCIAL  [FIDUCIAL-MICRO]  69.01,83.97 270 top
FID64  FIDUCIALUFIDUCIAL  [FIDUCIAL-MICRO]  64.36,70.92 270 top
FID65  FIDUCIALUFIDUCIAL  [FIDUCIAL-MICRO]  12.12,103.53 270 top
FID66  FIDUCIALUFIDUCIAL  [FIDUCIAL-MICRO]  7.47,90.47 270 top
FID67  FIDUCIALUFIDUCIAL  [FIDUCIAL-MICRO]  20.24,103.53 270 top
FID68  FIDUCIALUFIDUCIAL  [FIDUCIAL-MICRO]  15.6,90.47 270 top
FID69  FIDUCIALUFIDUCIAL  [FIDUCIAL-MICRO]  28.37,103.53 270 top
FID70  FIDUCIALUFIDUCIAL  [FIDUCIAL-MICRO]  23.72,90.47 270 top
FID71  FIDUCIALUFIDUCIAL  [FIDUCIAL-MICRO]  36.5,103.53 270 top
FID72  FIDUCIALUFIDUCIAL  [FIDUCIAL-MICRO]  31.85,90.47 270 top
FID73  FIDUCIALUFIDUCIAL  [FIDUCIAL-MICRO]  44.63,103.53 270 top
FID74  FIDUCIALUFIDUCIAL  [FIDUCIAL-MICRO]  39.98,90.47 270 top
FID75  FIDUCIALUFIDUCIAL  [FIDUCIAL-MICRO]  52.76,103.53 270 top
FID76  FIDUCIALUFIDUCIAL  [FIDUCIAL-MICRO]  48.11,90.47 270 top
FID77  FIDUCIALUFIDUCIAL  [FIDUCIAL-MICRO]  60.88,103.53 270 top
FID78  FIDUCIALUFIDUCIAL  [FIDUCIAL-MICRO]  56.24,90.47 270 top
FID79  FIDUCIALUFIDUCIAL  [FIDUCIAL-MICRO]  69.01,103.53 270 top
FID80  FIDUCIALUFIDUCIAL  [FIDUCIAL-MICRO]  64.36,90.47 270 top
FID81  FIDUCIALUFIDUCIAL  [FIDUCIAL-MICRO]  12.12,123.09 270 top
FID82  FIDUCIALUFIDUCIAL  [FIDUCIAL-MICRO]  7.47,110.03 270 top
FID83  FIDUCIALUFIDUCIAL  [FIDUCIAL-MICRO]  20.24,123.09 270 top
FID84  FIDUCIALUFIDUCIAL  [FIDUCIAL-MICRO]  15.6,110.03 270 top
FID85  FIDUCIALUFIDUCIAL  [FIDUCIAL-MICRO]  28.37,123.09 270 top
FID86  FIDUCIALUFIDUCIAL  [FIDUCIAL-MICRO]  23.72,110.03 270 top
FID87  FIDUCIALUFIDUCIAL  [FIDUCIAL-MICRO]  36.5,123.09 270 top
FID88  FIDUCIALUFIDUCIAL  [FIDUCIAL-MICRO]  31.85,110.03 270 top
FID89  FIDUCIALUFIDUCIAL  [FIDUCIAL-MICRO]  44.63,123.09 270 top
FID90  FIDUCIALUFIDUCIAL  [FIDUCIAL-MICRO]  39.98,110.03 270 top
FID91  FIDUCIALUFIDUCIAL  [FIDUCIAL-MICRO]  52.76,123.09 270 top
FID92  FIDUCIALUFIDUCIAL  [FIDUCIAL-MICRO]  48.11,110.03 270 top
FID93  FIDUCIALUFIDUCIAL  [FIDUCIAL-MICRO]  60.88,123.09 270 top
FID94  FIDUCIALUFIDUCIAL  [FIDUCIAL-MICRO]  56.24,110.03 270 top
FID95  FIDUCIALUFIDUCIAL  [FIDUCIAL-MICRO]  69.01,123.09 270 top
FID96  FIDUCIALUFIDUCIAL  [FIDUCIAL-MICRO]  64.36,110.03 270 top
FID97  FIDUCIALUFIDUCIAL  [FIDUCIAL-MICRO]  12.12,142.65 270 top
FID98  FIDUCIALUFIDUCIAL  [FIDUCIAL-MICRO]  7.47,129.59 270 top
FID99  FIDUCIALUFIDUCIAL  [FIDUCIAL-MICRO]  20.24,142.65 270 top
FID100  FIDUCIALUFIDUCIAL  [FIDUCIAL-MICRO]  15.6,129.59 270 top
FID101  FIDUCIALUFIDUCIAL  [FIDUCIAL-MICRO]  28.37,142.65 270 top
FID102  FIDUCIALUFIDUCIAL  [FIDUCIAL-MICRO]  23.72,129.59 270 top
FID103  FIDUCIALUFIDUCIAL  [FIDUCIAL-MICRO]  36.5,142.65 270 top
FID104  FIDUCIALUFIDUCIAL  [FIDUCIAL-MICRO]  31.85,129.59 270 top
FID105  FIDUCIALUFIDUCIAL  [FIDUCIAL-MICRO]  44.63,142.65 270 top
FID106  FIDUCIALUFIDUCIAL  [FIDUCIAL-MICRO]  39.98,129.59 270 top
FID107  FIDUCIALUFIDUCIAL  [FIDUCIAL-MICRO]  52.76,142.65 270 top
FID108  FIDUCIALUFIDUCIAL  [FIDUCIAL-MICRO]  48.11,129.59 270 top
FID109  FIDUCIALUFIDUCIAL  [FIDUCIAL-MICRO]  60.88,142.65 270 top
FID110  FIDUCIALUFIDUCIAL  [FIDUCIAL-MICRO]  56.24,129.59 270 top
FID111  FIDUCIALUFIDUCIAL  [FIDUCIAL-MICRO]  69.01,142.65 270 top
FID112  FIDUCIALUFIDUCIAL  [FIDUCIAL-MICRO]  64.36,129.59 270 top
FID113  FIDUCIALUFIDUCIAL  [FIDUCIAL-MICRO]  12.12,162.2 270 top
FID114  FIDUCIALUFIDUCIAL  [FIDUCIAL-MICRO]  7.47,149.15 270 top
FID115  FIDUCIALUFIDUCIAL  [FIDUCIAL-MICRO]  20.24,162.2 270 top
FID116  FIDUCIALUFIDUCIAL  [FIDUCIAL-MICRO]  15.6,149.15 270 top
FID117  FIDUCIALUFIDUCIAL  [FIDUCIAL-MICRO]  28.37,162.2 270 top
FID118  FIDUCIALUFIDUCIAL  [FIDUCIAL-MICRO]  23.72,149.15 270 top
FID119  FIDUCIALUFIDUCIAL  [FIDUCIAL-MICRO]  36.5,162.2 270 top
FID120  FIDUCIALUFIDUCIAL  [FIDUCIAL-MICRO]  31.85,149.15 270 top
FID121  FIDUCIALUFIDUCIAL  [FIDUCIAL-MICRO]  44.63,162.2 270 top
FID122  FIDUCIALUFIDUCIAL  [FIDUCIAL-MICRO]  39.98,149.15 270 top
FID123  FIDUCIALUFIDUCIAL  [FIDUCIAL-MICRO]  52.76,162.2 270 top
FID124  FIDUCIALUFIDUCIAL  [FIDUCIAL-MICRO]  48.11,149.15 270 top
FID125  FIDUCIALUFIDUCIAL  [FIDUCIAL-MICRO]  60.88,162.2 270 top
FID126  FIDUCIALUFIDUCIAL  [FIDUCIAL-MICRO]  56.24,149.15 270 top
FID127  FIDUCIALUFIDUCIAL  [FIDUCIAL-MICRO]  69.01,162.2 270 top
FID128  FIDUCIALUFIDUCIAL  [FIDUCIAL-MICRO]  64.36,149.15 270 top
FRAME1  FRAME-LETTER  [CREATIVE_COMMONS]  -11.94,-12.19 0 top  (outside the outline)
FRAME2  FRAME-LETTER  [CREATIVE_COMMONS]  -3.81,-12.19 0 top  (outside the outline)
FRAME3  FRAME-LETTER  [CREATIVE_COMMONS]  4.32,-12.19 0 top  (outside the outline)
FRAME4  FRAME-LETTER  [CREATIVE_COMMONS]  12.45,-12.19 0 top  (outside the outline)
FRAME5  FRAME-LETTER  [CREATIVE_COMMONS]  20.57,-12.19 0 top  (outside the outline)
FRAME6  FRAME-LETTER  [CREATIVE_COMMONS]  28.7,-12.19 0 top  (outside the outline)
FRAME7  FRAME-LETTER  [CREATIVE_COMMONS]  36.83,-12.19 0 top  (outside the outline)
FRAME8  FRAME-LETTER  [CREATIVE_COMMONS]  44.96,-12.19 0 top  (outside the outline)
FRAME9  FRAME-LETTER  [CREATIVE_COMMONS]  -11.94,7.37 0 top  (outside the outline)
FRAME10  FRAME-LETTER  [CREATIVE_COMMONS]  -3.81,7.37 0 top  (outside the outline)
FRAME11  FRAME-LETTER  [CREATIVE_COMMONS]  4.32,7.37 0 top
FRAME12  FRAME-LETTER  [CREATIVE_COMMONS]  12.45,7.37 0 top
FRAME13  FRAME-LETTER  [CREATIVE_COMMONS]  20.57,7.37 0 top
FRAME14  FRAME-LETTER  [CREATIVE_COMMONS]  28.7,7.37 0 top
FRAME15  FRAME-LETTER  [CREATIVE_COMMONS]  36.83,7.37 0 top
FRAME16  FRAME-LETTER  [CREATIVE_COMMONS]  44.96,7.37 0 top
FRAME17  FRAME-LETTER  [CREATIVE_COMMONS]  -11.94,26.92 0 top  (outside the outline)
FRAME18  FRAME-LETTER  [CREATIVE_COMMONS]  -3.81,26.92 0 top  (outside the outline)
FRAME19  FRAME-LETTER  [CREATIVE_COMMONS]  4.32,26.92 0 top
FRAME20  FRAME-LETTER  [CREATIVE_COMMONS]  12.45,26.92 0 top
FRAME21  FRAME-LETTER  [CREATIVE_COMMONS]  20.57,26.92 0 top
FRAME22  FRAME-LETTER  [CREATIVE_COMMONS]  28.7,26.92 0 top
FRAME23  FRAME-LETTER  [CREATIVE_COMMONS]  36.83,26.92 0 top
FRAME24  FRAME-LETTER  [CREATIVE_COMMONS]  44.96,26.92 0 top
FRAME25  FRAME-LETTER  [CREATIVE_COMMONS]  -11.94,46.48 0 top  (outside the outline)
FRAME26  FRAME-LETTER  [CREATIVE_COMMONS]  -3.81,46.48 0 top  (outside the outline)
FRAME27  FRAME-LETTER  [CREATIVE_COMMONS]  4.32,46.48 0 top
FRAME28  FRAME-LETTER  [CREATIVE_COMMONS]  12.45,46.48 0 top
FRAME29  FRAME-LETTER  [CREATIVE_COMMONS]  20.57,46.48 0 top
FRAME30  FRAME-LETTER  [CREATIVE_COMMONS]  28.7,46.48 0 top
FRAME31  FRAME-LETTER  [CREATIVE_COMMONS]  36.83,46.48 0 top
FRAME32  FRAME-LETTER  [CREATIVE_COMMONS]  44.96,46.48 0 top
FRAME33  FRAME-LETTER  [CREATIVE_COMMONS]  -11.94,66.04 0 top  (outside the outline)
FRAME34  FRAME-LETTER  [CREATIVE_COMMONS]  -3.81,66.04 0 top  (outside the outline)
FRAME35  FRAME-LETTER  [CREATIVE_COMMONS]  4.32,66.04 0 top
FRAME36  FRAME-LETTER  [CREATIVE_COMMONS]  12.45,66.04 0 top
FRAME37  FRAME-LETTER  [CREATIVE_COMMONS]  20.57,66.04 0 top
FRAME38  FRAME-LETTER  [CREATIVE_COMMONS]  28.7,66.04 0 top
FRAME39  FRAME-LETTER  [CREATIVE_COMMONS]  36.83,66.04 0 top
FRAME40  FRAME-LETTER  [CREATIVE_COMMONS]  44.96,66.04 0 top
FRAME41  FRAME-LETTER  [CREATIVE_COMMONS]  -11.94,85.6 0 top  (outside the outline)
FRAME42  FRAME-LETTER  [CREATIVE_COMMONS]  -3.81,85.6 0 top  (outside the outline)
FRAME43  FRAME-LETTER  [CREATIVE_COMMONS]  4.32,85.6 0 top
FRAME44  FRAME-LETTER  [CREATIVE_COMMONS]  12.45,85.6 0 top
FRAME45  FRAME-LETTER  [CREATIVE_COMMONS]  20.57,85.6 0 top
FRAME46  FRAME-LETTER  [CREATIVE_COMMONS]  28.7,85.6 0 top
FRAME47  FRAME-LETTER  [CREATIVE_COMMONS]  36.83,85.6 0 top
FRAME48  FRAME-LETTER  [CREATIVE_COMMONS]  44.96,85.6 0 top
FRAME49  FRAME-LETTER  [CREATIVE_COMMONS]  -11.94,105.16 0 top  (outside the outline)
FRAME50  FRAME-LETTER  [CREATIVE_COMMONS]  -3.81,105.16 0 top  (outside the outline)
FRAME51  FRAME-LETTER  [CREATIVE_COMMONS]  4.32,105.16 0 top
FRAME52  FRAME-LETTER  [CREATIVE_COMMONS]  12.45,105.16 0 top
FRAME53  FRAME-LETTER  [CREATIVE_COMMONS]  20.57,105.16 0 top
FRAME54  FRAME-LETTER  [CREATIVE_COMMONS]  28.7,105.16 0 top
FRAME55  FRAME-LETTER  [CREATIVE_COMMONS]  36.83,105.16 0 top
FRAME56  FRAME-LETTER  [CREATIVE_COMMONS]  44.96,105.16 0 top
FRAME57  FRAME-LETTER  [CREATIVE_COMMONS]  -11.94,124.71 0 top  (outside the outline)
FRAME58  FRAME-LETTER  [CREATIVE_COMMONS]  -3.81,124.71 0 top  (outside the outline)
FRAME59  FRAME-LETTER  [CREATIVE_COMMONS]  4.32,124.71 0 top
FRAME60  FRAME-LETTER  [CREATIVE_COMMONS]  12.45,124.71 0 top
FRAME61  FRAME-LETTER  [CREATIVE_COMMONS]  20.57,124.71 0 top
FRAME62  FRAME-LETTER  [CREATIVE_COMMONS]  28.7,124.71 0 top
FRAME63  FRAME-LETTER  [CREATIVE_COMMONS]  36.83,124.71 0 top
FRAME64  FRAME-LETTER  [CREATIVE_COMMONS]  44.96,124.71 0 top
I2C_PU  S_MODE  [SMT-JUMPER_3_2-NC_TRACE_SILK]  10.62,10.38 0 bottom
I2C_PU1  S_MODE  [SMT-JUMPER_3_2-NC_TRACE_SILK]  18.75,10.38 0 bottom
I2C_PU2  S_MODE  [SMT-JUMPER_3_2-NC_TRACE_SILK]  26.87,10.38 0 bottom
I2C_PU3  S_MODE  [SMT-JUMPER_3_2-NC_TRACE_SILK]  35,10.38 0 bottom
I2C_PU4  S_MODE  [SMT-JUMPER_3_2-NC_TRACE_SILK]  43.13,10.38 0 bottom
I2C_PU5  S_MODE  [SMT-JUMPER_3_2-NC_TRACE_SILK]  51.26,10.38 0 bottom
I2C_PU6  S_MODE  [SMT-JUMPER_3_2-NC_TRACE_SILK]  59.39,10.38 0 bottom
I2C_PU7  S_MODE  [SMT-JUMPER_3_2-NC_TRACE_SILK]  67.51,10.38 0 bottom
I2C_PU8  S_MODE  [SMT-JUMPER_3_2-NC_TRACE_SILK]  10.62,29.94 0 bottom
I2C_PU9  S_MODE  [SMT-JUMPER_3_2-NC_TRACE_SILK]  18.75,29.94 0 bottom
I2C_PU10  S_MODE  [SMT-JUMPER_3_2-NC_TRACE_SILK]  26.87,29.94 0 bottom
I2C_PU11  S_MODE  [SMT-JUMPER_3_2-NC_TRACE_SILK]  35,29.94 0 bottom
I2C_PU12  S_MODE  [SMT-JUMPER_3_2-NC_TRACE_SILK]  43.13,29.94 0 bottom
I2C_PU13  S_MODE  [SMT-JUMPER_3_2-NC_TRACE_SILK]  51.26,29.94 0 bottom
I2C_PU14  S_MODE  [SMT-JUMPER_3_2-NC_TRACE_SILK]  59.39,29.94 0 bottom
I2C_PU15  S_MODE  [SMT-JUMPER_3_2-NC_TRACE_SILK]  67.51,29.94 0 bottom
I2C_PU16  S_MODE  [SMT-JUMPER_3_2-NC_TRACE_SILK]  10.62,49.5 0 bottom
I2C_PU17  S_MODE  [SMT-JUMPER_3_2-NC_TRACE_SILK]  18.75,49.5 0 bottom
I2C_PU18  S_MODE  [SMT-JUMPER_3_2-NC_TRACE_SILK]  26.87,49.5 0 bottom
I2C_PU19  S_MODE  [SMT-JUMPER_3_2-NC_TRACE_SILK]  35,49.5 0 bottom
I2C_PU20  S_MODE  [SMT-JUMPER_3_2-NC_TRACE_SILK]  43.13,49.5 0 bottom
I2C_PU21  S_MODE  [SMT-JUMPER_3_2-NC_TRACE_SILK]  51.26,49.5 0 bottom
I2C_PU22  S_MODE  [SMT-JUMPER_3_2-NC_TRACE_SILK]  59.39,49.5 0 bottom
I2C_PU23  S_MODE  [SMT-JUMPER_3_2-NC_TRACE_SILK]  67.51,49.5 0 bottom
I2C_PU24  S_MODE  [SMT-JUMPER_3_2-NC_TRACE_SILK]  10.62,69.06 0 bottom
I2C_PU25  S_MODE  [SMT-JUMPER_3_2-NC_TRACE_SILK]  18.75,69.06 0 bottom
I2C_PU26  S_MODE  [SMT-JUMPER_3_2-NC_TRACE_SILK]  26.87,69.06 0 bottom
I2C_PU27  S_MODE  [SMT-JUMPER_3_2-NC_TRACE_SILK]  35,69.06 0 bottom
I2C_PU28  S_MODE  [SMT-JUMPER_3_2-NC_TRACE_SILK]  43.13,69.06 0 bottom
I2C_PU29  S_MODE  [SMT-JUMPER_3_2-NC_TRACE_SILK]  51.26,69.06 0 bottom
I2C_PU30  S_MODE  [SMT-JUMPER_3_2-NC_TRACE_SILK]  59.39,69.06 0 bottom
I2C_PU31  S_MODE  [SMT-JUMPER_3_2-NC_TRACE_SILK]  67.51,69.06 0 bottom
I2C_PU32  S_MODE  [SMT-JUMPER_3_2-NC_TRACE_SILK]  10.62,88.61 0 bottom
I2C_PU33  S_MODE  [SMT-JUMPER_3_2-NC_TRACE_SILK]  18.75,88.61 0 bottom
I2C_PU34  S_MODE  [SMT-JUMPER_3_2-NC_TRACE_SILK]  26.87,88.61 0 bottom
I2C_PU35  S_MODE  [SMT-JUMPER_3_2-NC_TRACE_SILK]  35,88.61 0 bottom
I2C_PU36  S_MODE  [SMT-JUMPER_3_2-NC_TRACE_SILK]  43.13,88.61 0 bottom
I2C_PU37  S_MODE  [SMT-JUMPER_3_2-NC_TRACE_SILK]  51.26,88.61 0 bottom
I2C_PU38  S_MODE  [SMT-JUMPER_3_2-NC_TRACE_SILK]  59.39,88.61 0 bottom
I2C_PU39  S_MODE  [SMT-JUMPER_3_2-NC_TRACE_SILK]  67.51,88.61 0 bottom
I2C_PU40  S_MODE  [SMT-JUMPER_3_2-NC_TRACE_SILK]  10.62,108.17 0 bottom
I2C_PU41  S_MODE  [SMT-JUMPER_3_2-NC_TRACE_SILK]  18.75,108.17 0 bottom
I2C_PU42  S_MODE  [SMT-JUMPER_3_2-NC_TRACE_SILK]  26.87,108.17 0 bottom
I2C_PU43  S_MODE  [SMT-JUMPER_3_2-NC_TRACE_SILK]  35,108.17 0 bottom
I2C_PU44  S_MODE  [SMT-JUMPER_3_2-NC_TRACE_SILK]  43.13,108.17 0 bottom
I2C_PU45  S_MODE  [SMT-JUMPER_3_2-NC_TRACE_SILK]  51.26,108.17 0 bottom
I2C_PU46  S_MODE  [SMT-JUMPER_3_2-NC_TRACE_SILK]  59.39,108.17 0 bottom
I2C_PU47  S_MODE  [SMT-JUMPER_3_2-NC_TRACE_SILK]  67.51,108.17 0 bottom
I2C_PU48  S_MODE  [SMT-JUMPER_3_2-NC_TRACE_SILK]  10.62,127.73 0 bottom
I2C_PU49  S_MODE  [SMT-JUMPER_3_2-NC_TRACE_SILK]  18.75,127.73 0 bottom
I2C_PU50  S_MODE  [SMT-JUMPER_3_2-NC_TRACE_SILK]  26.87,127.73 0 bottom
I2C_PU51  S_MODE  [SMT-JUMPER_3_2-NC_TRACE_SILK]  35,127.73 0 bottom
I2C_PU52  S_MODE  [SMT-JUMPER_3_2-NC_TRACE_SILK]  43.13,127.73 0 bottom
I2C_PU53  S_MODE  [SMT-JUMPER_3_2-NC_TRACE_SILK]  51.26,127.73 0 bottom
I2C_PU54  S_MODE  [SMT-JUMPER_3_2-NC_TRACE_SILK]  59.39,127.73 0 bottom
I2C_PU55  S_MODE  [SMT-JUMPER_3_2-NC_TRACE_SILK]  67.51,127.73 0 bottom
I2C_PU56  S_MODE  [SMT-JUMPER_3_2-NC_TRACE_SILK]  10.62,147.29 0 bottom
I2C_PU57  S_MODE  [SMT-JUMPER_3_2-NC_TRACE_SILK]  18.75,147.29 0 bottom
I2C_PU58  S_MODE  [SMT-JUMPER_3_2-NC_TRACE_SILK]  26.87,147.29 0 bottom
I2C_PU59  S_MODE  [SMT-JUMPER_3_2-NC_TRACE_SILK]  35,147.29 0 bottom
I2C_PU60  S_MODE  [SMT-JUMPER_3_2-NC_TRACE_SILK]  43.13,147.29 0 bottom
I2C_PU61  S_MODE  [SMT-JUMPER_3_2-NC_TRACE_SILK]  51.26,147.29 0 bottom
I2C_PU62  S_MODE  [SMT-JUMPER_3_2-NC_TRACE_SILK]  59.39,147.29 0 bottom
I2C_PU63  S_MODE  [SMT-JUMPER_3_2-NC_TRACE_SILK]  67.51,147.29 0 bottom
J1  QWIIC_RIGHT_ANGLE  [JST04_1MM_RA]  10.67,11.94 0 top
J2  [1X01_1MM_NO_SILK]  8.13,20.83 0 top
J3  QWIIC_RIGHT_ANGLE  [JST04_1MM_RA]  18.8,11.94 0 top
J4  [1X01_1MM_NO_SILK]  13.21,20.83 0 top
J5  [1X01_1MM_NO_SILK]  16.26,20.83 0 top
J6  [1X01_1MM_NO_SILK]  21.34,20.83 0 top
J7  QWIIC_RIGHT_ANGLE  [JST04_1MM_RA]  26.92,11.94 0 top
J8  [1X01_1MM_NO_SILK]  24.38,20.83 0 top
J9  [1X01_1MM_NO_SILK]  29.46,20.83 0 top
J10  QWIIC_RIGHT_ANGLE  [JST04_1MM_RA]  35.05,11.94 0 top
J11  [1X01_1MM_NO_SILK]  32.51,20.83 0 top
J12  [1X01_1MM_NO_SILK]  37.59,20.83 0 top
J13  QWIIC_RIGHT_ANGLE  [JST04_1MM_RA]  43.18,11.94 0 top
J14  [1X01_1MM_NO_SILK]  40.64,20.83 0 top
J15  [1X01_1MM_NO_SILK]  45.72,20.83 0 top
J16  QWIIC_RIGHT_ANGLE  [JST04_1MM_RA]  51.31,11.94 0 top
J17  [1X01_1MM_NO_SILK]  48.77,20.83 0 top
J18  [1X01_1MM_NO_SILK]  53.85,20.83 0 top
J19  QWIIC_RIGHT_ANGLE  [JST04_1MM_RA]  59.44,11.94 0 top
J20  [1X01_1MM_NO_SILK]  56.9,20.83 0 top
J21  [1X01_1MM_NO_SILK]  61.98,20.83 0 top
J22  QWIIC_RIGHT_ANGLE  [JST04_1MM_RA]  67.56,11.94 0 top
J23  [1X01_1MM_NO_SILK]  65.02,20.83 0 top
J24  [1X01_1MM_NO_SILK]  70.1,20.83 0 top
J25  QWIIC_RIGHT_ANGLE  [JST04_1MM_RA]  10.67,31.5 0 top
J26  [1X01_1MM_NO_SILK]  8.13,40.39 0 top
J27  [1X01_1MM_NO_SILK]  13.21,40.39 0 top
J28  QWIIC_RIGHT_ANGLE  [JST04_1MM_RA]  18.8,31.5 0 top
J29  [1X01_1MM_NO_SILK]  16.26,40.39 0 top
J30  [1X01_1MM_NO_SILK]  21.34,40.39 0 top
J31  QWIIC_RIGHT_ANGLE  [JST04_1MM_RA]  26.92,31.5 0 top
J32  [1X01_1MM_NO_SILK]  24.38,40.39 0 top
J33  [1X01_1MM_NO_SILK]  29.46,40.39 0 top
J34  QWIIC_RIGHT_ANGLE  [JST04_1MM_RA]  35.05,31.5 0 top
J35  [1X01_1MM_NO_SILK]  32.51,40.39 0 top
J36  [1X01_1MM_NO_SILK]  37.59,40.39 0 top
J37  QWIIC_RIGHT_ANGLE  [JST04_1MM_RA]  43.18,31.5 0 top
J38  [1X01_1MM_NO_SILK]  40.64,40.39 0 top
J39  [1X01_1MM_NO_SILK]  45.72,40.39 0 top
J40  QWIIC_RIGHT_ANGLE  [JST04_1MM_RA]  51.31,31.5 0 top
J41  [1X01_1MM_NO_SILK]  48.77,40.39 0 top
J42  [1X01_1MM_NO_SILK]  53.85,40.39 0 top
J43  QWIIC_RIGHT_ANGLE  [JST04_1MM_RA]  59.44,31.5 0 top
J44  [1X01_1MM_NO_SILK]  56.9,40.39 0 top
J45  [1X01_1MM_NO_SILK]  61.98,40.39 0 top
J46  QWIIC_RIGHT_ANGLE  [JST04_1MM_RA]  67.56,31.5 0 top
J47  [1X01_1MM_NO_SILK]  65.02,40.39 0 top
J48  [1X01_1MM_NO_SILK]  70.1,40.39 0 top
J49  QWIIC_RIGHT_ANGLE  [JST04_1MM_RA]  10.67,51.05 0 top
J50  [1X01_1MM_NO_SILK]  8.13,59.94 0 top
J51  [1X01_1MM_NO_SILK]  13.21,59.94 0 top
J52  QWIIC_RIGHT_ANGLE  [JST04_1MM_RA]  18.8,51.05 0 top
J53  [1X01_1MM_NO_SILK]  16.26,59.94 0 top
J54  [1X01_1MM_NO_SILK]  21.34,59.94 0 top
J55  QWIIC_RIGHT_ANGLE  [JST04_1MM_RA]  26.92,51.05 0 top
J56  [1X01_1MM_NO_SILK]  24.38,59.94 0 top
J57  [1X01_1MM_NO_SILK]  29.46,59.94 0 top
J58  QWIIC_RIGHT_ANGLE  [JST04_1MM_RA]  35.05,51.05 0 top
J59  [1X01_1MM_NO_SILK]  32.51,59.94 0 top
J60  [1X01_1MM_NO_SILK]  37.59,59.94 0 top
J61  QWIIC_RIGHT_ANGLE  [JST04_1MM_RA]  43.18,51.05 0 top
J62  [1X01_1MM_NO_SILK]  40.64,59.94 0 top
J63  [1X01_1MM_NO_SILK]  45.72,59.94 0 top
J64  QWIIC_RIGHT_ANGLE  [JST04_1MM_RA]  51.31,51.05 0 top
J65  [1X01_1MM_NO_SILK]  48.77,59.94 0 top
J66  [1X01_1MM_NO_SILK]  53.85,59.94 0 top
J67  QWIIC_RIGHT_ANGLE  [JST04_1MM_RA]  59.44,51.05 0 top
J68  [1X01_1MM_NO_SILK]  56.9,59.94 0 top
J69  [1X01_1MM_NO_SILK]  61.98,59.94 0 top
J70  QWIIC_RIGHT_ANGLE  [JST04_1MM_RA]  67.56,51.05 0 top
J71  [1X01_1MM_NO_SILK]  65.02,59.94 0 top
J72  [1X01_1MM_NO_SILK]  70.1,59.94 0 top
J73  QWIIC_RIGHT_ANGLE  [JST04_1MM_RA]  10.67,70.61 0 top
J74  [1X01_1MM_NO_SILK]  8.13,79.5 0 top
J75  [1X01_1MM_NO_SILK]  13.21,79.5 0 top
J76  QWIIC_RIGHT_ANGLE  [JST04_1MM_RA]  18.8,70.61 0 top
J77  [1X01_1MM_NO_SILK]  16.26,79.5 0 top
J78  [1X01_1MM_NO_SILK]  21.34,79.5 0 top
J79  QWIIC_RIGHT_ANGLE  [JST04_1MM_RA]  26.92,70.61 0 top
J80  [1X01_1MM_NO_SILK]  24.38,79.5 0 top
J81  [1X01_1MM_NO_SILK]  29.46,79.5 0 top
J82  QWIIC_RIGHT_ANGLE  [JST04_1MM_RA]  35.05,70.61 0 top
J83  [1X01_1MM_NO_SILK]  32.51,79.5 0 top
J84  [1X01_1MM_NO_SILK]  37.59,79.5 0 top
J85  QWIIC_RIGHT_ANGLE  [JST04_1MM_RA]  43.18,70.61 0 top
J86  [1X01_1MM_NO_SILK]  40.64,79.5 0 top
J87  [1X01_1MM_NO_SILK]  45.72,79.5 0 top
J88  QWIIC_RIGHT_ANGLE  [JST04_1MM_RA]  51.31,70.61 0 top
J89  [1X01_1MM_NO_SILK]  48.77,79.5 0 top
J90  [1X01_1MM_NO_SILK]  53.85,79.5 0 top
J91  QWIIC_RIGHT_ANGLE  [JST04_1MM_RA]  59.44,70.61 0 top
J92  [1X01_1MM_NO_SILK]  56.9,79.5 0 top
J93  [1X01_1MM_NO_SILK]  61.98,79.5 0 top
J94  QWIIC_RIGHT_ANGLE  [JST04_1MM_RA]  67.56,70.61 0 top
J95  [1X01_1MM_NO_SILK]  65.02,79.5 0 top
J96  [1X01_1MM_NO_SILK]  70.1,79.5 0 top
J97  QWIIC_RIGHT_ANGLE  [JST04_1MM_RA]  10.67,90.17 0 top
J98  [1X01_1MM_NO_SILK]  8.13,99.06 0 top
J99  [1X01_1MM_NO_SILK]  13.21,99.06 0 top
J100  QWIIC_RIGHT_ANGLE  [JST04_1MM_RA]  18.8,90.17 0 top
J101  [1X01_1MM_NO_SILK]  16.26,99.06 0 top
J102  [1X01_1MM_NO_SILK]  21.34,99.06 0 top
J103  QWIIC_RIGHT_ANGLE  [JST04_1MM_RA]  26.92,90.17 0 top
J104  [1X01_1MM_NO_SILK]  24.38,99.06 0 top
J105  [1X01_1MM_NO_SILK]  29.46,99.06 0 top
J106  QWIIC_RIGHT_ANGLE  [JST04_1MM_RA]  35.05,90.17 0 top
J107  [1X01_1MM_NO_SILK]  32.51,99.06 0 top
J108  [1X01_1MM_NO_SILK]  37.59,99.06 0 top
J109  QWIIC_RIGHT_ANGLE  [JST04_1MM_RA]  43.18,90.17 0 top
J110  [1X01_1MM_NO_SILK]  40.64,99.06 0 top
J111  [1X01_1MM_NO_SILK]  45.72,99.06 0 top
J112  QWIIC_RIGHT_ANGLE  [JST04_1MM_RA]  51.31,90.17 0 top
J113  [1X01_1MM_NO_SILK]  48.77,99.06 0 top
J114  [1X01_1MM_NO_SILK]  53.85,99.06 0 top
J115  QWIIC_RIGHT_ANGLE  [JST04_1MM_RA]  59.44,90.17 0 top
J116  [1X01_1MM_NO_SILK]  56.9,99.06 0 top
J117  [1X01_1MM_NO_SILK]  61.98,99.06 0 top
J118  QWIIC_RIGHT_ANGLE  [JST04_1MM_RA]  67.56,90.17 0 top
J119  [1X01_1MM_NO_SILK]  65.02,99.06 0 top
J120  [1X01_1MM_NO_SILK]  70.1,99.06 0 top
J121  QWIIC_RIGHT_ANGLE  [JST04_1MM_RA]  10.67,109.73 0 top
J122  [1X01_1MM_NO_SILK]  8.13,118.62 0 top
J123  [1X01_1MM_NO_SILK]  13.21,118.62 0 top
J124  QWIIC_RIGHT_ANGLE  [JST04_1MM_RA]  18.8,109.73 0 top
J125  [1X01_1MM_NO_SILK]  16.26,118.62 0 top
J126  [1X01_1MM_NO_SILK]  21.34,118.62 0 top
J127  QWIIC_RIGHT_ANGLE  [JST04_1MM_RA]  26.92,109.73 0 top
J128  [1X01_1MM_NO_SILK]  24.38,118.62 0 top
J129  [1X01_1MM_NO_SILK]  29.46,118.62 0 top
J130  QWIIC_RIGHT_ANGLE  [JST04_1MM_RA]  35.05,109.73 0 top
J131  [1X01_1MM_NO_SILK]  32.51,118.62 0 top
J132  [1X01_1MM_NO_SILK]  37.59,118.62 0 top
J133  QWIIC_RIGHT_ANGLE  [JST04_1MM_RA]  43.18,109.73 0 top
J134  [1X01_1MM_NO_SILK]  40.64,118.62 0 top
J135  [1X01_1MM_NO_SILK]  45.72,118.62 0 top
J136  QWIIC_RIGHT_ANGLE  [JST04_1MM_RA]  51.31,109.73 0 top
J137  [1X01_1MM_NO_SILK]  48.77,118.62 0 top
J138  [1X01_1MM_NO_SILK]  53.85,118.62 0 top
J139  QWIIC_RIGHT_ANGLE  [JST04_1MM_RA]  59.44,109.73 0 top
J140  [1X01_1MM_NO_SILK]  56.9,118.62 0 top
J141  [1X01_1MM_NO_SILK]  61.98,118.62 0 top
J142  QWIIC_RIGHT_ANGLE  [JST04_1MM_RA]  67.56,109.73 0 top
J143  [1X01_1MM_NO_SILK]  65.02,118.62 0 top
J144  [1X01_1MM_NO_SILK]  70.1,118.62 0 top
J145  QWIIC_RIGHT_ANGLE  [JST04_1MM_RA]  10.67,129.29 0 top
J146  [1X01_1MM_NO_SILK]  8.13,138.18 0 top
J147  [1X01_1MM_NO_SILK]  13.21,138.18 0 top
J148  QWIIC_RIGHT_ANGLE  [JST04_1MM_RA]  18.8,129.29 0 top
J149  [1X01_1MM_NO_SILK]  16.26,138.18 0 top
J150  [1X01_1MM_NO_SILK]  21.34,138.18 0 top
J151  QWIIC_RIGHT_ANGLE  [JST04_1MM_RA]  26.92,129.29 0 top
J152  [1X01_1MM_NO_SILK]  24.38,138.18 0 top
J153  [1X01_1MM_NO_SILK]  29.46,138.18 0 top
J154  QWIIC_RIGHT_ANGLE  [JST04_1MM_RA]  35.05,129.29 0 top
J155  [1X01_1MM_NO_SILK]  32.51,138.18 0 top
J156  [1X01_1MM_NO_SILK]  37.59,138.18 0 top
J157  QWIIC_RIGHT_ANGLE  [JST04_1MM_RA]  43.18,129.29 0 top
J158  [1X01_1MM_NO_SILK]  40.64,138.18 0 top
J159  [1X01_1MM_NO_SILK]  45.72,138.18 0 top
J160  QWIIC_RIGHT_ANGLE  [JST04_1MM_RA]  51.31,129.29 0 top
J161  [1X01_1MM_NO_SILK]  48.77,138.18 0 top
J162  [1X01_1MM_NO_SILK]  53.85,138.18 0 top
J163  QWIIC_RIGHT_ANGLE  [JST04_1MM_RA]  59.44,129.29 0 top
J164  [1X01_1MM_NO_SILK]  56.9,138.18 0 top
J165  [1X01_1MM_NO_SILK]  61.98,138.18 0 top
J166  QWIIC_RIGHT_ANGLE  [JST04_1MM_RA]  67.56,129.29 0 top
J167  [1X01_1MM_NO_SILK]  65.02,138.18 0 top
J168  [1X01_1MM_NO_SILK]  70.1,138.18 0 top
J169  QWIIC_RIGHT_ANGLE  [JST04_1MM_RA]  10.67,148.84 0 top
J170  [1X01_1MM_NO_SILK]  8.13,157.73 0 top
J171  [1X01_1MM_NO_SILK]  13.21,157.73 0 top
J172  QWIIC_RIGHT_ANGLE  [JST04_1MM_RA]  18.8,148.84 0 top
J173  [1X01_1MM_NO_SILK]  16.26,157.73 0 top
J174  [1X01_1MM_NO_SILK]  21.34,157.73 0 top
J175  QWIIC_RIGHT_ANGLE  [JST04_1MM_RA]  26.92,148.84 0 top
J176  [1X01_1MM_NO_SILK]  24.38,157.73 0 top
J177  [1X01_1MM_NO_SILK]  29.46,157.73 0 top
J178  QWIIC_RIGHT_ANGLE  [JST04_1MM_RA]  35.05,148.84 0 top
J179  [1X01_1MM_NO_SILK]  32.51,157.73 0 top
J180  [1X01_1MM_NO_SILK]  37.59,157.73 0 top
J181  QWIIC_RIGHT_ANGLE  [JST04_1MM_RA]  43.18,148.84 0 top
J182  [1X01_1MM_NO_SILK]  40.64,157.73 0 top
J183  [1X01_1MM_NO_SILK]  45.72,157.73 0 top
J184  QWIIC_RIGHT_ANGLE  [JST04_1MM_RA]  51.31,148.84 0 top
J185  [1X01_1MM_NO_SILK]  48.77,157.73 0 top
J186  [1X01_1MM_NO_SILK]  53.85,157.73 0 top
J187  QWIIC_RIGHT_ANGLE  [JST04_1MM_RA]  59.44,148.84 0 top
J188  [1X01_1MM_NO_SILK]  56.9,157.73 0 top
J189  [1X01_1MM_NO_SILK]  61.98,157.73 0 top
J190  QWIIC_RIGHT_ANGLE  [JST04_1MM_RA]  67.56,148.84 0 top
J191  [1X01_1MM_NO_SILK]  65.02,157.73 0 top
J192  [1X01_1MM_NO_SILK]  70.1,157.73 0 top
LED  JUMPER-SMT_2_NC_TRACE_SILK  [SMT-JUMPER_2_NC_TRACE_SILK]  13.36,13.23 270 bottom
LED1  JUMPER-SMT_2_NC_TRACE_SILK  [SMT-JUMPER_2_NC_TRACE_SILK]  21.49,13.23 270 bottom
LED2  JUMPER-SMT_2_NC_TRACE_SILK  [SMT-JUMPER_2_NC_TRACE_SILK]  29.62,13.23 270 bottom
LED3  JUMPER-SMT_2_NC_TRACE_SILK  [SMT-JUMPER_2_NC_TRACE_SILK]  37.74,13.23 270 bottom
LED4  JUMPER-SMT_2_NC_TRACE_SILK  [SMT-JUMPER_2_NC_TRACE_SILK]  45.87,13.23 270 bottom
LED5  JUMPER-SMT_2_NC_TRACE_SILK  [SMT-JUMPER_2_NC_TRACE_SILK]  54,13.23 270 bottom
LED6  JUMPER-SMT_2_NC_TRACE_SILK  [SMT-JUMPER_2_NC_TRACE_SILK]  62.13,13.23 270 bottom
LED7  JUMPER-SMT_2_NC_TRACE_SILK  [SMT-JUMPER_2_NC_TRACE_SILK]  70.26,13.23 270 bottom
LED8  JUMPER-SMT_2_NC_TRACE_SILK  [SMT-JUMPER_2_NC_TRACE_SILK]  13.36,32.79 270 bottom
LED9  JUMPER-SMT_2_NC_TRACE_SILK  [SMT-JUMPER_2_NC_TRACE_SILK]  21.49,32.79 270 bottom
LED10  JUMPER-SMT_2_NC_TRACE_SILK  [SMT-JUMPER_2_NC_TRACE_SILK]  29.62,32.79 270 bottom
LED11  JUMPER-SMT_2_NC_TRACE_SILK  [SMT-JUMPER_2_NC_TRACE_SILK]  37.74,32.79 270 bottom
LED12  JUMPER-SMT_2_NC_TRACE_SILK  [SMT-JUMPER_2_NC_TRACE_SILK]  45.87,32.79 270 bottom
LED13  JUMPER-SMT_2_NC_TRACE_SILK  [SMT-JUMPER_2_NC_TRACE_SILK]  54,32.79 270 bottom
LED14  JUMPER-SMT_2_NC_TRACE_SILK  [SMT-JUMPER_2_NC_TRACE_SILK]  62.13,32.79 270 bottom
LED15  JUMPER-SMT_2_NC_TRACE_SILK  [SMT-JUMPER_2_NC_TRACE_SILK]  70.26,32.79 270 bottom
LED16  JUMPER-SMT_2_NC_TRACE_SILK  [SMT-JUMPER_2_NC_TRACE_SILK]  13.36,52.35 270 bottom
LED17  JUMPER-SMT_2_NC_TRACE_SILK  [SMT-JUMPER_2_NC_TRACE_SILK]  21.49,52.35 270 bottom
LED18  JUMPER-SMT_2_NC_TRACE_SILK  [SMT-JUMPER_2_NC_TRACE_SILK]  29.62,52.35 270 bottom
LED19  JUMPER-SMT_2_NC_TRACE_SILK  [SMT-JUMPER_2_NC_TRACE_SILK]  37.74,52.35 270 bottom
LED20  JUMPER-SMT_2_NC_TRACE_SILK  [SMT-JUMPER_2_NC_TRACE_SILK]  45.87,52.35 270 bottom
LED21  JUMPER-SMT_2_NC_TRACE_SILK  [SMT-JUMPER_2_NC_TRACE_SILK]  54,52.35 270 bottom
LED22  JUMPER-SMT_2_NC_TRACE_SILK  [SMT-JUMPER_2_NC_TRACE_SILK]  62.13,52.35 270 bottom
LED23  JUMPER-SMT_2_NC_TRACE_SILK  [SMT-JUMPER_2_NC_TRACE_SILK]  70.26,52.35 270 bottom
LED24  JUMPER-SMT_2_NC_TRACE_SILK  [SMT-JUMPER_2_NC_TRACE_SILK]  13.36,71.91 270 bottom
LED25  JUMPER-SMT_2_NC_TRACE_SILK  [SMT-JUMPER_2_NC_TRACE_SILK]  21.49,71.91 270 bottom
LED26  JUMPER-SMT_2_NC_TRACE_SILK  [SMT-JUMPER_2_NC_TRACE_SILK]  29.62,71.91 270 bottom
LED27  JUMPER-SMT_2_NC_TRACE_SILK  [SMT-JUMPER_2_NC_TRACE_SILK]  37.74,71.91 270 bottom
LED28  JUMPER-SMT_2_NC_TRACE_SILK  [SMT-JUMPER_2_NC_TRACE_SILK]  45.87,71.91 270 bottom
LED29  JUMPER-SMT_2_NC_TRACE_SILK  [SMT-JUMPER_2_NC_TRACE_SILK]  54,71.91 270 bottom
LED30  JUMPER-SMT_2_NC_TRACE_SILK  [SMT-JUMPER_2_NC_TRACE_SILK]  62.13,71.91 270 bottom
LED31  JUMPER-SMT_2_NC_TRACE_SILK  [SMT-JUMPER_2_NC_TRACE_SILK]  70.26,71.91 270 bottom
LED32  JUMPER-SMT_2_NC_TRACE_SILK  [SMT-JUMPER_2_NC_TRACE_SILK]  13.36,91.47 270 bottom
LED33  JUMPER-SMT_2_NC_TRACE_SILK  [SMT-JUMPER_2_NC_TRACE_SILK]  21.49,91.47 270 bottom
LED34  JUMPER-SMT_2_NC_TRACE_SILK  [SMT-JUMPER_2_NC_TRACE_SILK]  29.62,91.47 270 bottom
LED35  JUMPER-SMT_2_NC_TRACE_SILK  [SMT-JUMPER_2_NC_TRACE_SILK]  37.74,91.47 270 bottom
LED36  JUMPER-SMT_2_NC_TRACE_SILK  [SMT-JUMPER_2_NC_TRACE_SILK]  45.87,91.47 270 bottom
LED37  JUMPER-SMT_2_NC_TRACE_SILK  [SMT-JUMPER_2_NC_TRACE_SILK]  54,91.47 270 bottom
LED38  JUMPER-SMT_2_NC_TRACE_SILK  [SMT-JUMPER_2_NC_TRACE_SILK]  62.13,91.47 270 bottom
LED39  JUMPER-SMT_2_NC_TRACE_SILK  [SMT-JUMPER_2_NC_TRACE_SILK]  70.26,91.47 270 bottom
LED40  JUMPER-SMT_2_NC_TRACE_SILK  [SMT-JUMPER_2_NC_TRACE_SILK]  13.36,111.02 270 bottom
LED41  JUMPER-SMT_2_NC_TRACE_SILK  [SMT-JUMPER_2_NC_TRACE_SILK]  21.49,111.02 270 bottom
LED42  JUMPER-SMT_2_NC_TRACE_SILK  [SMT-JUMPER_2_NC_TRACE_SILK]  29.62,111.02 270 bottom
LED43  JUMPER-SMT_2_NC_TRACE_SILK  [SMT-JUMPER_2_NC_TRACE_SILK]  37.74,111.02 270 bottom
LED44  JUMPER-SMT_2_NC_TRACE_SILK  [SMT-JUMPER_2_NC_TRACE_SILK]  45.87,111.02 270 bottom
LED45  JUMPER-SMT_2_NC_TRACE_SILK  [SMT-JUMPER_2_NC_TRACE_SILK]  54,111.02 270 bottom
LED46  JUMPER-SMT_2_NC_TRACE_SILK  [SMT-JUMPER_2_NC_TRACE_SILK]  62.13,111.02 270 bottom
LED47  JUMPER-SMT_2_NC_TRACE_SILK  [SMT-JUMPER_2_NC_TRACE_SILK]  70.26,111.02 270 bottom
LED48  JUMPER-SMT_2_NC_TRACE_SILK  [SMT-JUMPER_2_NC_TRACE_SILK]  13.36,130.58 270 bottom
LED49  JUMPER-SMT_2_NC_TRACE_SILK  [SMT-JUMPER_2_NC_TRACE_SILK]  21.49,130.58 270 bottom
LED50  JUMPER-SMT_2_NC_TRACE_SILK  [SMT-JUMPER_2_NC_TRACE_SILK]  29.62,130.58 270 bottom
LED51  JUMPER-SMT_2_NC_TRACE_SILK  [SMT-JUMPER_2_NC_TRACE_SILK]  37.74,130.58 270 bottom
LED52  JUMPER-SMT_2_NC_TRACE_SILK  [SMT-JUMPER_2_NC_TRACE_SILK]  45.87,130.58 270 bottom
LED53  JUMPER-SMT_2_NC_TRACE_SILK  [SMT-JUMPER_2_NC_TRACE_SILK]  54,130.58 270 bottom